# Altium PCB Biocoin_v1.3.PcbDoc (part 1 of 2)
Units mil, origin at the board's own origin, x right, y up, seen from the top; angles counter-clockwise.
Board outline 980.35 x 1027.62 mil, 6 copper layers (Top Signal, GND1, Middle Signal, Power, GND2, Bottom Signal), stack 37.008 mil thick; 101 components, 107 nets, 425 pads, 204 vias.
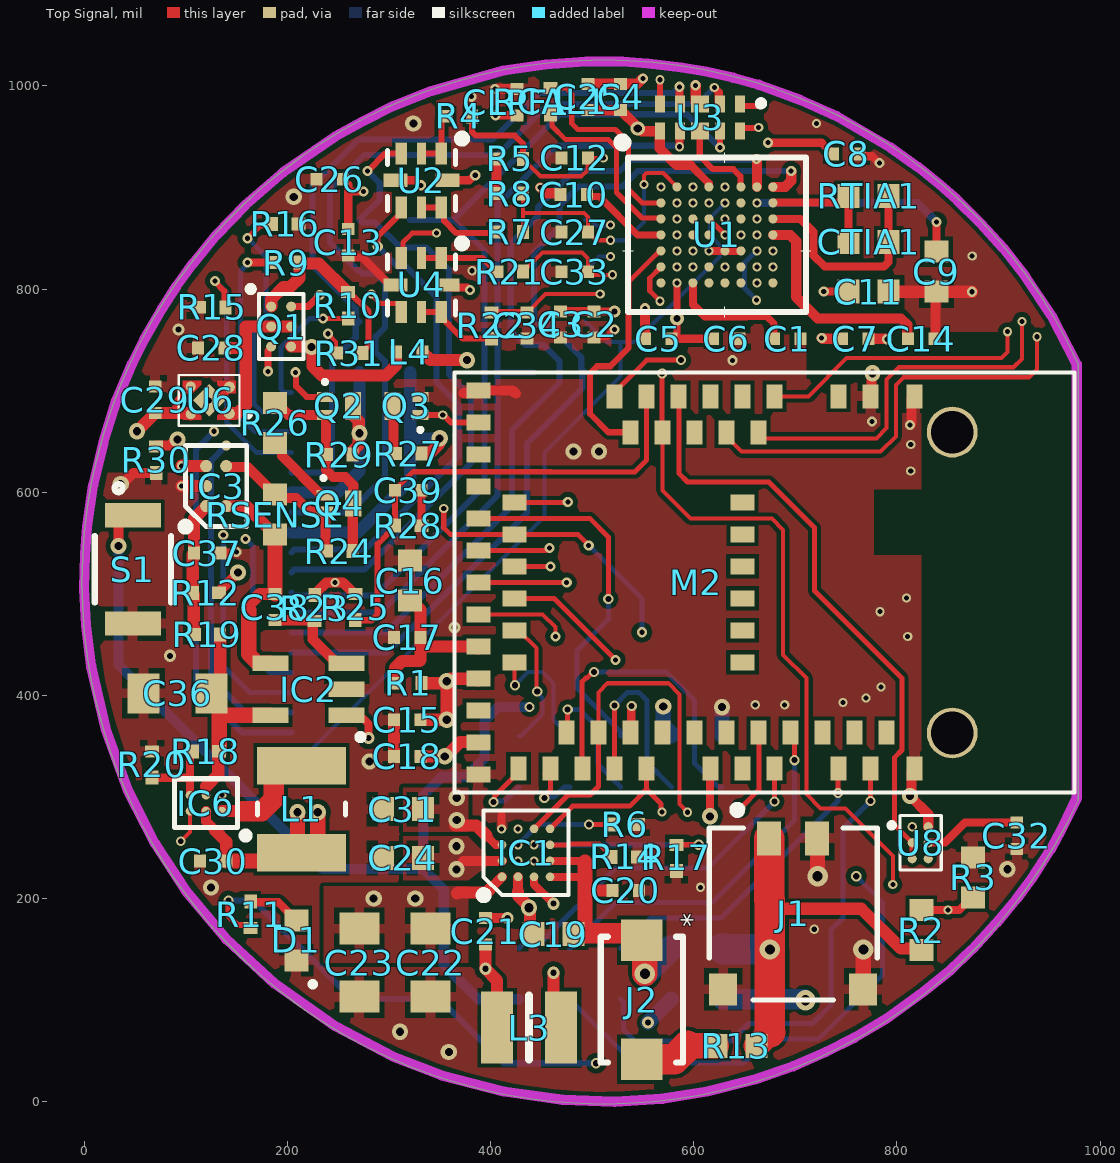
[diagram p0: Top Signal view]
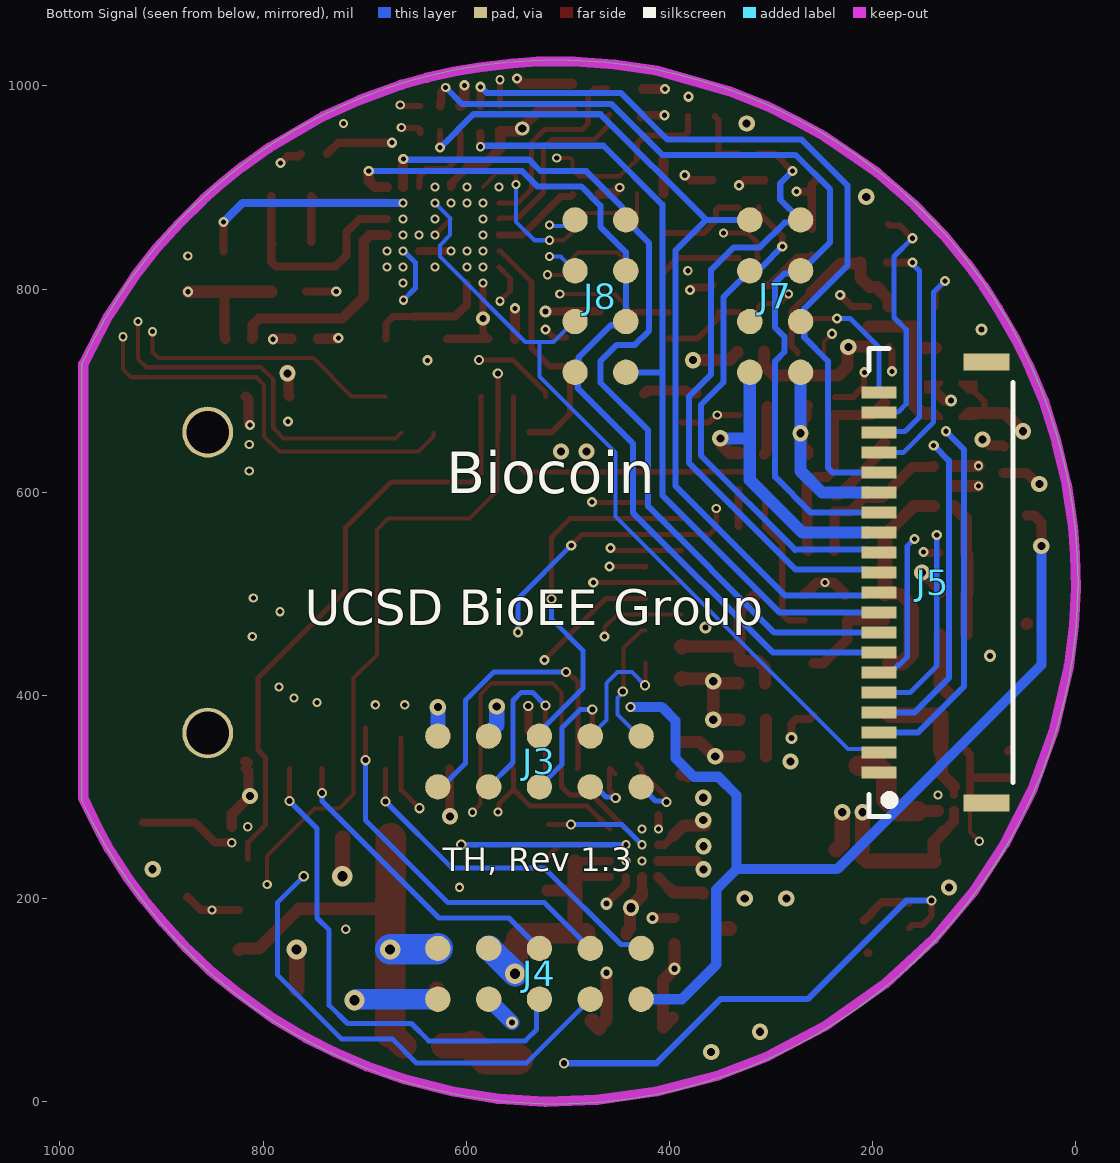
[diagram p1: Bottom Signal view, seen from below]
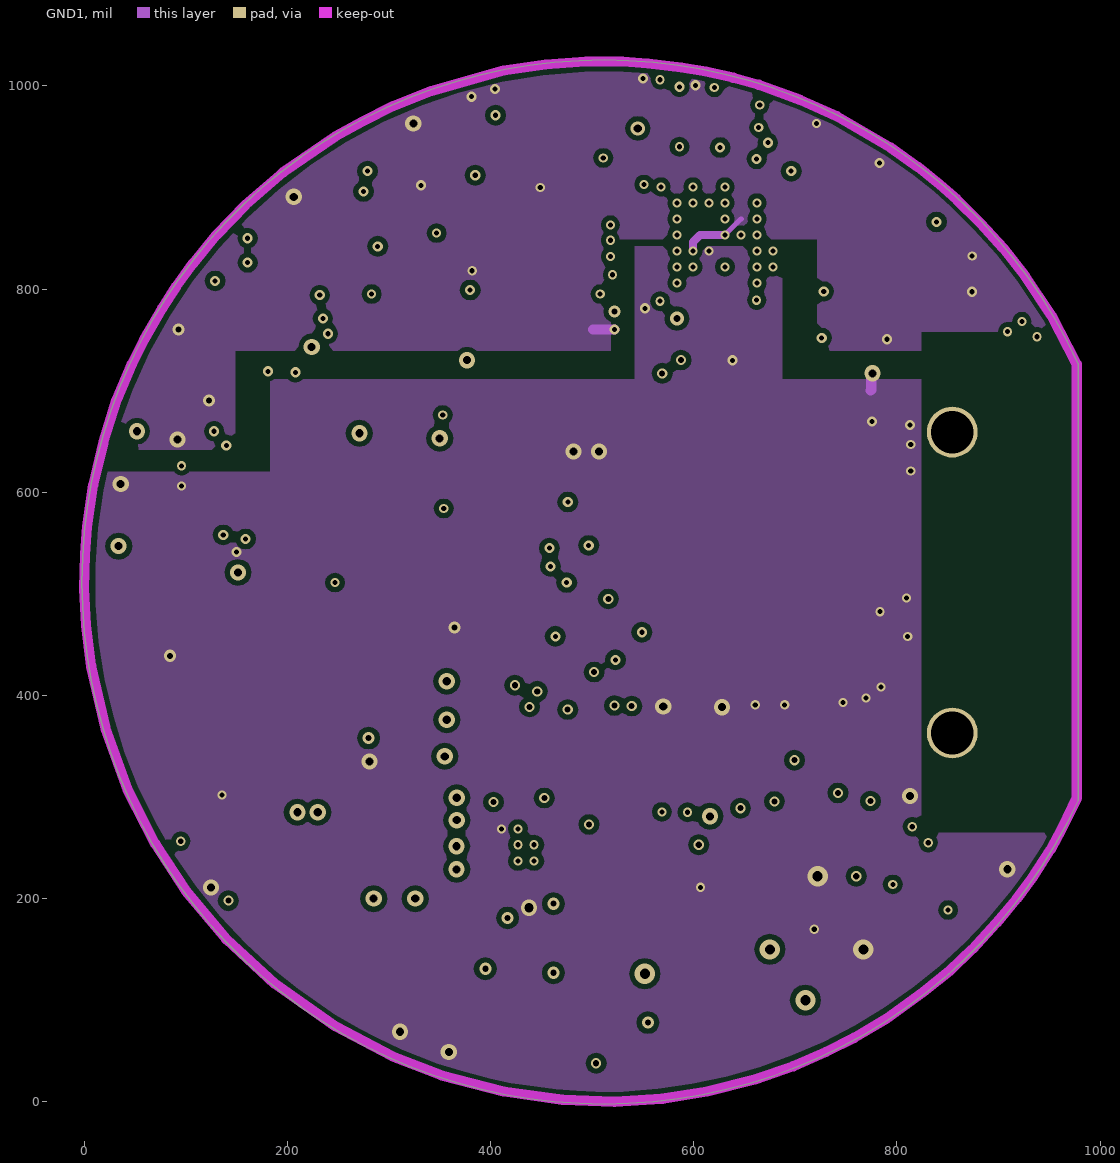
[diagram p2: GND1]
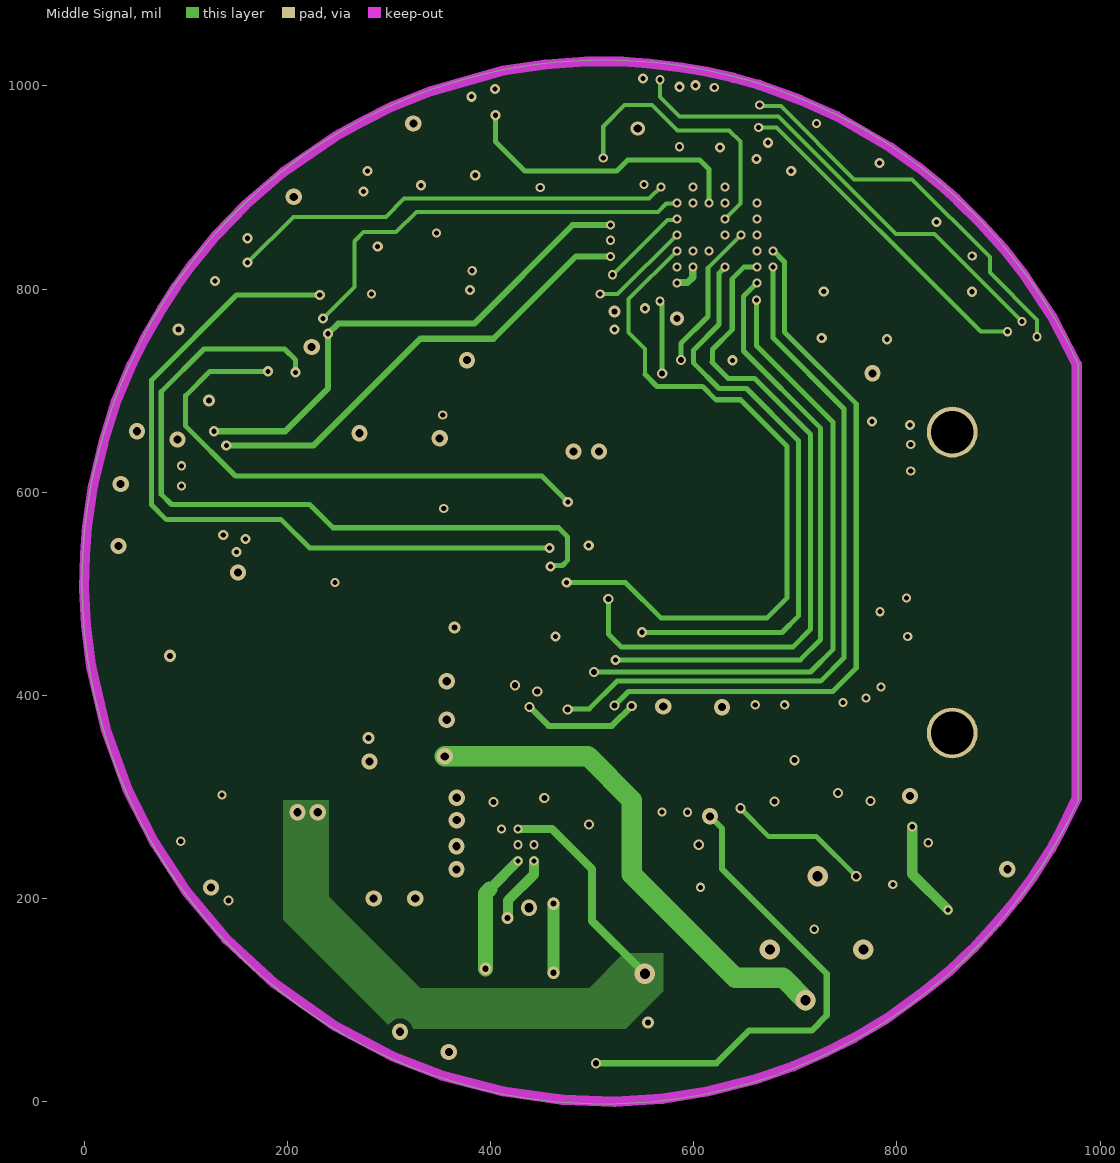
[diagram p3: Middle Signal]
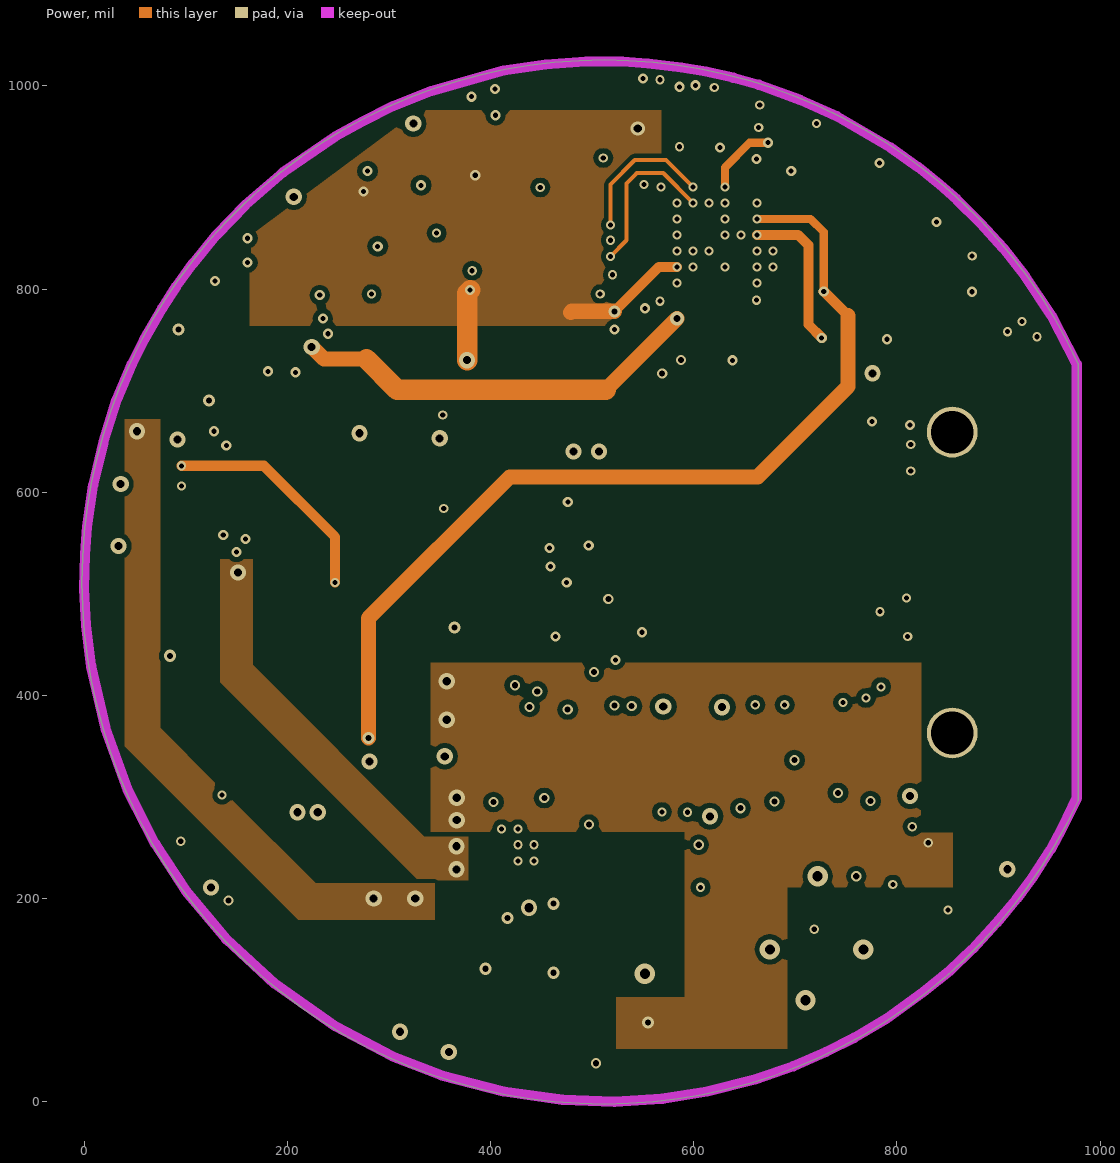
[diagram p4: Power]
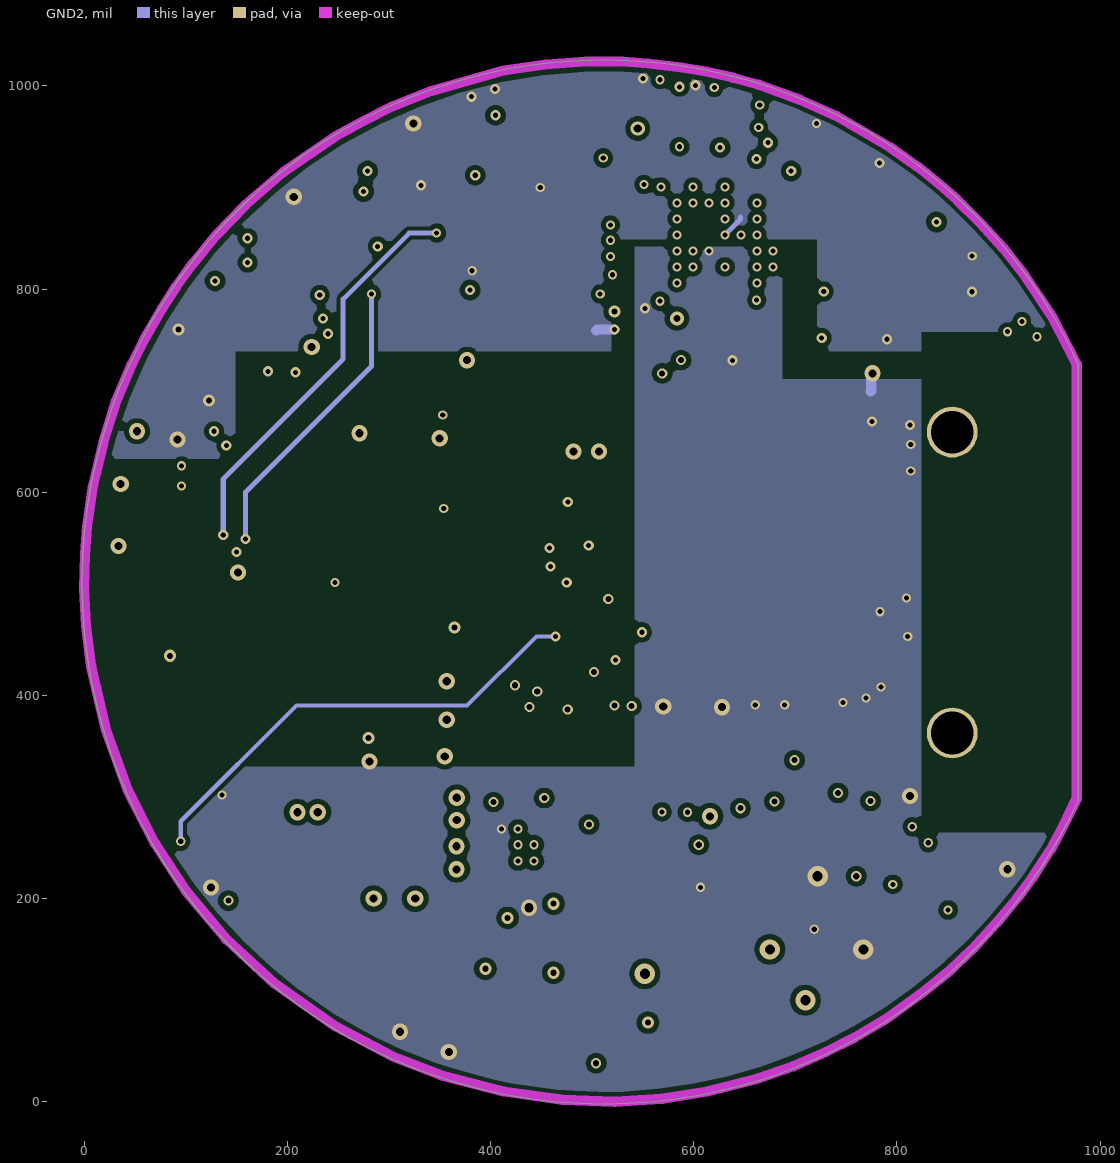
[diagram p5: GND2]
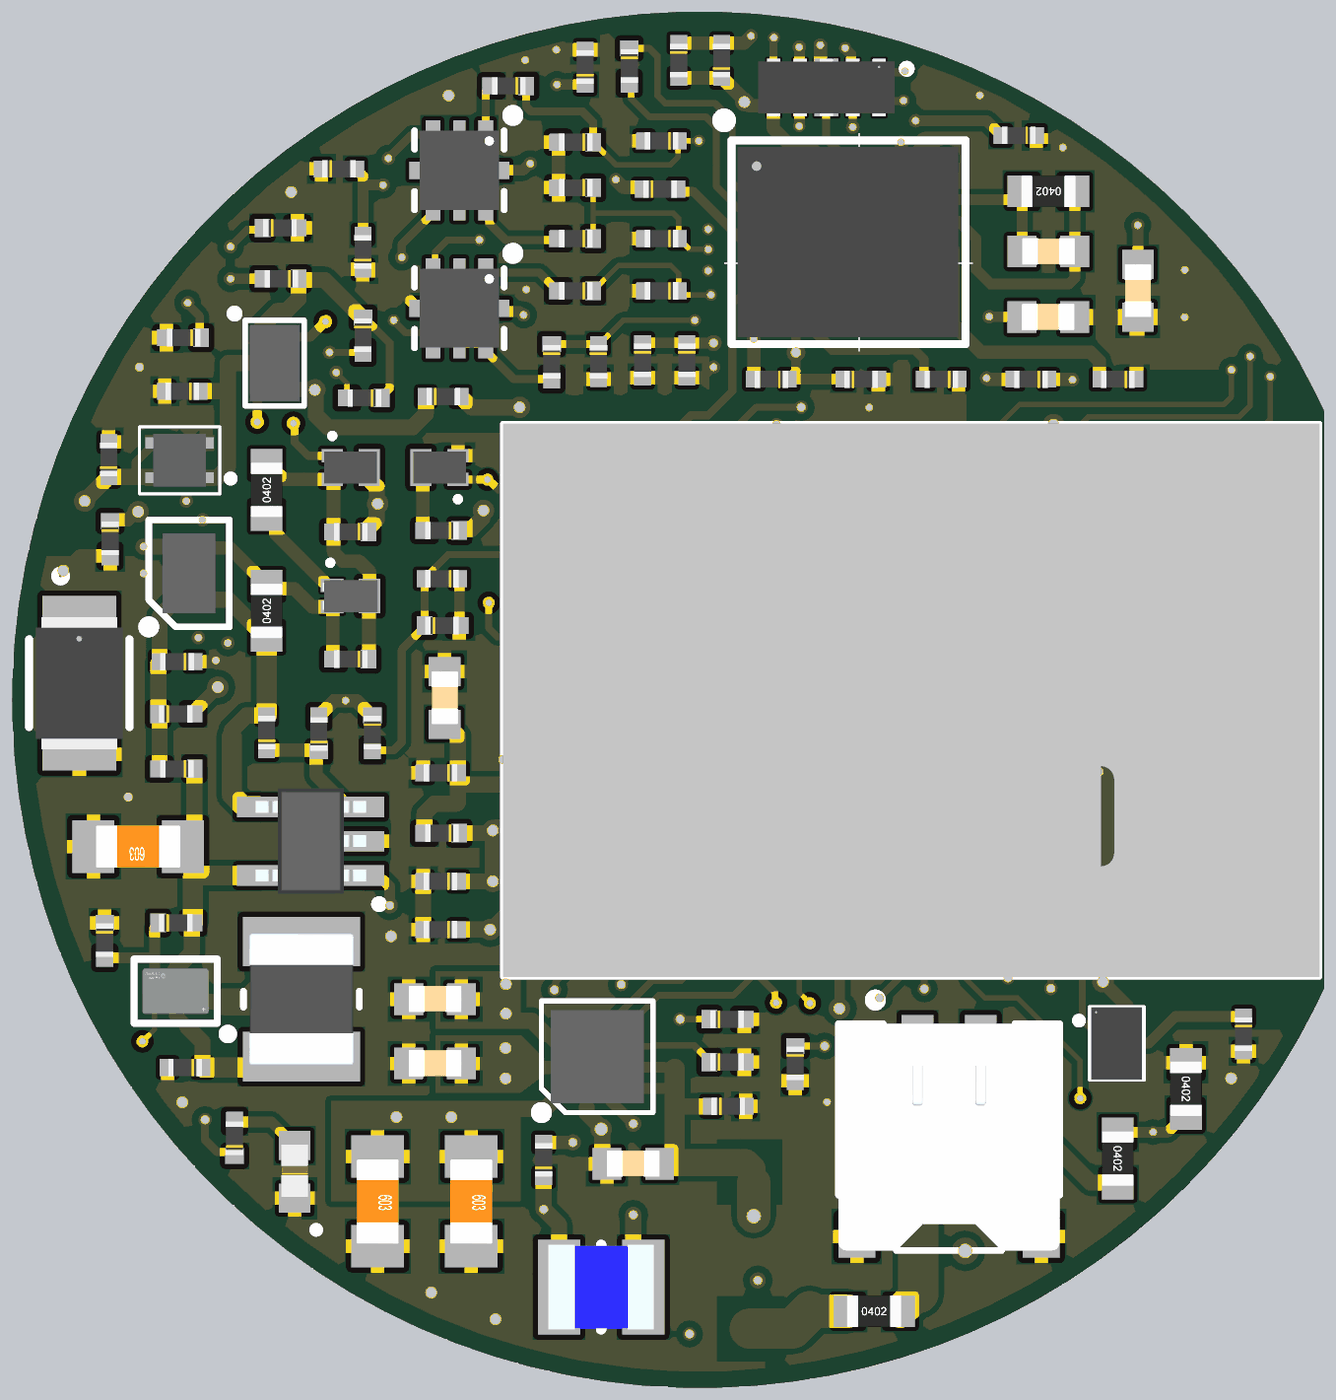
[diagram p7: 3D render of the assembled board from above, using the file's embedded part models]

## Layer stack, top to bottom
Top Solder: solder mask 0.4, Solder Resist, Dk 3.5
Top Signal: signal copper 1.378
Dielectric 2: prepreg 4.3307, PP-006, Dk 4.2
GND1: signal copper 1.378
Dielectric 4: core 7.874, FR-4, Dk 4.2
Middle Signal: signal copper 1.378
Dielectric 1: prepreg 4.3307, PP-006, Dk 4.2
Power: signal copper 1.378
Dielectric 5: core 7.874, FR-4, Dk 4.2
GND2: signal copper 1.378
Dielectric 3: prepreg 4.3307, PP-006, Dk 4.2
Bottom Signal: signal copper 1.378
Bottom Solder: solder mask 0.4, Solder Resist, Dk 3.5

## Board outline
978.29,296.33 978.29,726.71 978.2,727.09 ccw(c511.75,511.61) 511.75,1025.42 ccw(c511.75,511.61) -2.06,511.61 ccw(c511.75,511.61) 511.75,-2.2 ccw(c511.75,511.61)

## Design rules (kind name [scope] priority, off if disabled: settings)
Clearance Clearance_1 [All] p1: gap=4 ignorepadtopadclearanceinfootprint=TRUE except(5: Via-Fill Via-Poly Via-Region Fill-Hole Poly-Hole Region-Hole)
Clearance [All] p2: gap=5 ignorepadtopadclearanceinfootprint=TRUE
HoleSize [All] p1: absolutevalues=TRUE maxlimit=100 minlimit=4 maxpercent=80.000 minpercent=20.000
MinimumAnnularRing [All] p1: minimumring=2
MinimumSolderMaskSliver [All] p1: minsoldermaskwidth=2
PolygonConnect [All] p1: thpad.connectstyle=Relief thpad.reliefconductorwidth=10 thpad.reliefentries=4 thpad.polygonreliefangle="90 Angle" thpad.airgapwidth=8 smdpad.connectstyle=Relief smdpad.reliefconductorwidth=10 smdpad.reliefentries=4 smdpad.polygonreliefangle="90 Angle" smdpad.airgapwidth=5 via.connectstyle=Direct via.reliefconductorwidth=10 via.reliefentries=4 via.polygonreliefangle="90 Angle" via.airgapwidth=10
RoutingVias [All] p1: holewidth=4 width=8 viastyle="Through Hole" minholewidth=4 minwidth=8 maxholewidth=250 maxwidth=300
SilkToSilkClearance [All] p1: silktosilkclearance=5
SilkToSolderMaskClearance [IsPad] p1: minsilkscreentomaskgap=3 clearancetoexposedcopper=TRUE
SolderMaskExpansion [All] p1: expansion=4 istentingtop=FALSE
Width [All] p1: maxlimit=80 minlimit=4 preferedwidth=5
26 further rules are at their usual default settings.

## Classes and differential pairs
component class Current_Source: C37 C38 C39 IC2 IC3 Q2 Q3 Q4 R12 R19 R23 R24 R25 R26 R27 R28 R29 RSENSE
component class "Power Management": C19 C20 C21 C22 C23 C24 C28 C29 C30 C31 C36 IC1 IC6 J1 J2 L1 L3 L4 Q1 R6 R13 R14 R17 R18 R20 R30 U6
component class MCU_BLE_Module: C15 C16 C17 C18 C32 D1 J3 J4 M2 R1 R2 R3 R11 S1 U8
component class AFE: C1 C2 C3 C4 C5 C6 C7 C8 C9 C10 C11 C12 C13 C14 C25 C26 C27 C33 C34 CLPF1 CTIA1 J5 J7 J8 R4 R5 R7 R8 R9 R10 R15 R16 R21 R22 R31 RCAL1 RTIA1 U1 U2 U3 U4

## Components (designator, comment, footprint, x,y, rotation, side; value= is the part's Value field where it differs from the comment)
C1 "CAP" "0201 CAP" 692.09,751 r180 top value=470nF
C2 "CAP" "0201 CAP" 502,765.09 r270 top value=4.7uF
C3 "CAP" "0201 CAP" 469,765.09 r270 top value=100nF
C4 "CAP" "0201 CAP" 528,989 r90 top value=100nF
C5 "CAP" "0201 CAP" 565.09,751 r180 top value=4.7uF
C6 "CAP" "0201 CAP" 632.09,751 r0 top value=100nF
C7 "CAP" "0201 CAP" 759.09,751 r180 top value=470nF
C8 "CAP" "0201 CAP" 750,933 r180 top value=4.7uF
C9 "CAP" 0402-CAP 839,817.06 r90 top value=100nF
C10 "CAP" "0201 CAP" 482,893 r0 top value=470nF
C11 "CAP" 0402-CAP 772,797.32 r180 top value=100nF
C12 "CAP" "0201 CAP" 483,929 r180 top value=100nF
C13 "CAP" "0201 CAP" 260,846 r90 top value=100nF
C14 "CAP" "0201 CAP" 824.09,751 r180 top value=470nF
C15 "CAP" "0201 CAP" 318,376 r180 top value=4.7uF
C16 "CAP" 0402-CAP 321,513 r90 top value=22uF
C17 "CAP" "0201 CAP" 318,457 r180 top value=100nF
C18 "CAP" "0201 CAP" 318,340 r180 top value=4.7uF
C19 "CAP" 0402-CAP 462,165 r180 top value=22uF
C20 "CAP" "0201 CAP" 533,208 r0 top value=1uF
C21 "CAP" "0201 CAP" 395,168 r90 top value=100nF
C22 "CAP" 0603-CAP 341,137 r270 top value=47uF
C23 "CAP" 0603-CAP 271,137 r270 top value=47uF
C24 "CAP" 0402-CAP 313.86,240 r180 top value=22uF
C25 "CAP" "0201 CAP" 496,989 r270 top value=4.7uF
C26 "CAP" "0201 CAP" 242,908 r0 top value=4.7uF
C27 "CAP" "0201 CAP" 483,856 r180 top value=100nF
C28 "CAP" "0201 CAP" 125,742 r180 top value=4.7uF
C29 "CAP" "0201 CAP" 70,691 r90 top value=1uF
C30 "CAP" "0201 CAP" 127,237 r180 top value=4.7uF
C31 "CAP" 0402-CAP 313.86,288 r180 top value=22uF
C32 "CAP" "0201 CAP" 918,262 r270 top value=100nF
C33 "CAP" "0201 CAP" 483,817 r180 top value=100nF
C34 "CAP" "0201 CAP" 436,764.09 r270 top value=100nF
C36 "CAP" 0603-CAP 92,402 r180 top value=10uF
C37 "CAP" "0201 CAP" 121.09,540.07 r180 top value=100nF
C38 "CAP" "0201 CAP" 188,487 r90 top value=50nF
C39 "CAP" "0201 CAP" 319,602 r180 top value=1uF
CLPF1 "CAP" "0201 CAP" 426,984 r90 top value=100nF
CTIA1 "CAP" 0402-CAP 772.25,846.32 r180 top value=33nF
D1 "APHHS1005LCGCK" 0402-LED 209,159 r90 top
IC1 "MAX17270ENE+T" BGA16C40P4X4_177X177X50 435,245 r90 top
IC2 "OPA990IDCKR" SOT65P210X110-5N 221,406 r180 top
IC3 "MAX4372TEBT+T" BGA5C50P3X2_152X100X67 130,606 r90 top
IC6 "MAX17291ANT+T" MAXIM_INTEGRATED_N60N1-1_MFG 120,294 r180 top
J1 "BM02B-ACHSS-GAN-TF(LF)(SN)" JST_BM02B-ACHSS-GAN-TF(LF)(SN) 698,185 r0 top
J2 "PMEG3010ER,115" SDO_SOD-123FL_ONS-L 3459,50.5 r270 top
J3 "POGO_PIN_INTERFACE" POGO_PIN_INTERFACE_10PIN 428,310 r0 bottom
J4 "POGO_PIN_INTERFACE" POGO_PIN_INTERFACE_10PIN 428,101 r0 bottom
J5 "5034802000" MOLEX_5034802000 192,511 r90 bottom
J7 "POGO_PIN_INTERFACE_8pin" POGO_PIN_INTERFACE_8PIN 321,868 r90 bottom
J8 "POGO_PIN_INTERFACE_8pin" POGO_PIN_INTERFACE_8PIN 493,868 r90 bottom
L1 "DFE252012F-100M=P2" INDC2520X120N 214,288 r90 top
L3 "DFE201612E-2R2M=P2" 1286ASH1R0MP2 438,73 r180 top
L4 "IND" "0201 FERRITE" 320,738 r0 top
M2 "MDBT50Q_52840" MDBT50Q 974.77,511.25 r270 top
Q1 "CSD75208W1015" BGA6C50P2X3_145X95X62 194,763 r0 top
Q2 "DMP32D5SFB-7B" DESD6V8DLP7 241,685 r0 top
Q3 "DMN62D1LFB-7B" DESD6V8DLP7 327,685 r180 top
Q4 "TF412ST5G" TF412ST5G 251,589 r0 top
R1 "RES" "0201 RES" 319,412 r180 top value=0
R2 "RES" 0402-RES 824,169 r270 top value=10M
R3 "RES" 0402-RES 875,221 r270 top value=4.99M
R4 "RES" "0201 RES" 369,970 r180 top value=50k
R5 "RES" "0201 RES" 419,928 r180 top
R6 "RES" "0201 RES" 532,273 r0 top value=113k
R7 "RES" "0201 RES" 419,856 r180 top value=50k
R8 "RES" "0201 RES" 419,894 r180 top
R9 "RES" "0201 RES" 199,826 r180 top value=100k
R10 "RES" "0201 RES" 260,784 r270 top value=100k
R11 "RES" "0201 RES" 164,184 r90 top value=5K
R12 "RES" "0201 RES" 120,501 r0 top value=0
R13 "RES" 0402-RES 642,55 r0 top value=0
R14 "RES" "0201 RES" 532,241 r0 top value=80.6k
R15 "RES" "0201 RES" 126,782 r180 top value=0
R16 "RES" "0201 RES" 198,864 r0 top value=0
R17 "RES" "0201 RES" 583,240 r270 top value=113k
R18 "RES" "0201 RES" 120,345 r0 top value=5.6M
R19 "RES" "0201 RES" 121,460 r180 top value=0
R20 "RES" "0201 RES" 67,332 r270 top value=374k
R21 "RES" "0201 RES" 419,817 r180 top value=50k
R22 "RES" "0201 RES" 401,764.09 r270 top value=50k
R23 "RES" "0201 RES" 227,486 r90 top value=10k
R24 "RES" "0201 RES" 251,542 r180 top value=0
R25 "RES" "0201 RES" 267,487 r270 top value=1k
R26 "RES" 0402-RES 188,668.32 r90 top value=100
R27 "RES" "0201 RES" 319,638 r180 top value=0
R28 "RES" "0201 RES" 319,567 r0 top
R29 "RES" "0201 RES" 251,637 r180 top value=0
R30 "RES" "0201 RES" 71,632 r270 top value=0
R31 "RES" "0201 res" 261,737 r180 top value=100k
RCAL1 "RES" "0201 RES" 459,985 r270 top value=10K
RSENSE "RES" 0402-RES 188,578 r90 top value=100
RTIA1 "RES" 0402-RES 772.25,891.32 r180 top value=10M
S1 "NANOT100AS" NANOT100AS_CNK-M 48,524 r270 top
U1 "AD5940" CB-56-3_ADI 622.87,853.32 r0 top
U2 "TLV8542RUGR" QFN50P150X150X40-8N 332,907 r270 top
U3 "TMUX1104DQAR" USON_104DQAR_TEX 606.31,968.81 r270 top
U4 "TLV8542RUGR" QFN50P150X150X40-8N 332,804 r270 top
U6 "TPS7A2036PDQNR" DQN0004A-MFG 123.08,690.4 r180 top
U8 "MAX44264EWT+T" 21-0217D_W61B1-1_MXM 823,255 r0 top

## Footprints (in the part's own frame and the unit in brackets; to place one, negate y for a bottom-side part, rotate by r counter-clockwise, add the part's x,y. Pads: shape width x height; smd on the part's side, far side on the other; paste and mask are expansions set on the pad)
21-0217D_W61B1-1_MXM [mil]
  round 9 smd paste+0 mask+2: A1(-7.87,15.75) A2(7.87,15.75) B1(-7.87,0) B2(7.87,0) C1(-7.87,-15.75) C2(7.87,-15.75)
  silkscreen extent -28,-27 21,27, body extent -19,-27 19,27, height 27
"0201 CAP" [mm]
  rect 0.3x0.32 smd mask+0.076: 1(-0.33,0) 2(0.33,0)
  body extent -0.32,-0.17 0.32,0.17, height 0.33
"0201 FERRITE" [mm]
  rect 0.3x0.32 smd mask+0.076: 1(-0.33,0) 2(0.33,0)
  body extent -0.32,-0.17 0.32,0.17, height 0.33
"0201 RES" [mm]
  rect 0.3x0.35 smd: 1(-0.33,0)
  rect 0.35x0.32 smd: 2(0.33,0)
  body extent -0.32,-0.17 0.32,0.17, height 0.33
"0201 res" [mm]
  rect 0.3x0.35 smd: 1(-0.33,0)
  rect 0.35x0.32 smd: 2(0.33,0)
  body extent -0.32,-0.17 0.32,0.17, height 0.33
0402-CAP [mm] "Chip Capacitor, 2-Leads, Body 1.00x0.50mm, IPC Low Density"
  rect 0.55x0.6 smd mask+0.076: 1(-0.5,0) 2(0.5,0)
  body extent -0.51,-0.25 0.51,0.25, height 0.5
0402-LED [mm]
  rect 0.55x0.6 smd mask+0.076: 1(-0.5,0) 2(0.5,0)
  body extent -0.47,-0.25 0.52,0.25, height 0.51
0402-RES [mm]
  rect 0.55x0.6 smd mask+0.076: 1(-0.5,0) 2(0.5,0)
  body extent -0.52,-0.3 0.52,0.3, height 0.34
0603-CAP [mm] "Chip Capacitor, 2-Leads, Body 1.60x0.80mm, IPC Low Density"
  rect 0.8x1 smd: 1(-0.85,0) 2(0.85,0)
  body extent -0.8,-0.4 0.8,0.4, height 0.3
1286ASH1R0MP2 [mm]
  rect 0.8x1.8 smd: 1(-0.8,0) 2(0.8,0)
  silkscreen extent 0,-0.8 0,0.8, body extent -1,-0.8 1,0.8, height 1.2
BGA5C50P3X2_152X100X67 [mm]
  round 0.305 smd mask+0.064: A1(-0.5,0.25) A2(0,0.25) A3(0.5,0.25) B1(-0.5,-0.25) B3(0.5,-0.25)
  silkscreen extent -1.11,-0.76 1.01,0.86, body extent -0.76,-0.5 0.76,0.5, height 0.67
BGA6C50P2X3_145X95X62 [mm]
  round 0.25 smd mask+0.089: A1(-0.25,0.5) A2(0.25,0.5) B1(-0.25,0) B2(0.25,0) C1(-0.25,-0.5) C2(0.25,-0.5)
  silkscreen extent -0.86,-0.81 0.56,1.04, body extent -0.48,-0.72 0.48,0.72, height 0.63
BGA16C40P4X4_177X177X50 [mm]
  round 0.216 smd mask+0.064: A1(-0.6,0.6) A2(-0.2,0.6) A3(0.2,0.6) A4(0.6,0.6) B1(-0.6,0.2) B2(-0.2,0.2) B3(0.2,0.2) B4(0.6,0.2) C1(-0.6,-0.2) C2(-0.2,-0.2) C3(0.2,-0.2) C4(0.6,-0.2) D1(-0.6,-0.6) D2(-0.2,-0.6) D3(0.2,-0.6) D4(0.6,-0.6)
  silkscreen extent -1.16,-1.06 1.06,1.16, body extent -0.88,-0.88 0.88,0.88, height 0.5
CB-56-3_ADI [mil]
  round 9 smd paste+0 mask+2: A1(-55.12,47.24) A2(-39.37,47.24) A3(-23.62,47.24) A4(-7.87,47.24) A5(7.87,47.24) A6(23.62,47.24) A7(39.37,47.24) A8(55.12,47.24) B1(-55.12,31.5) B2(-39.37,31.5) B3(-23.62,31.5) B4(-7.87,31.5) B5(7.87,31.5) B6(23.62,31.5) B7(39.37,31.5) B8(55.12,31.5) C1(-55.12,15.75) C2(-39.37,15.75) C3(-23.62,15.75) C4(-7.87,15.75) C5(7.87,15.75) C6(23.62,15.75) C7(39.37,15.75) C8(55.12,15.75) D1(-55.12,0) D2(-39.37,0) D3(-23.62,0) D4(-7.87,0) D5(7.87,0) D6(23.62,0) D7(39.37,0) D8(55.12,0) E1(-55.12,-15.75) E2(-39.37,-15.75) E3(-23.62,-15.75) E4(-7.87,-15.75) E5(7.87,-15.75) E6(23.62,-15.75) E7(39.37,-15.75) E8(55.12,-15.75) F1(-55.12,-31.5) F2(-39.37,-31.5) F3(-23.62,-31.5) F4(-7.87,-31.5) F5(7.87,-31.5) F6(23.62,-31.5) F7(39.37,-31.5) F8(55.12,-31.5) G1(-55.12,-47.24) G2(-39.37,-47.24) G3(-23.62,-47.24) G4(-7.87,-47.24) G5(7.87,-47.24) G6(23.62,-47.24) G7(39.37,-47.24) G8(55.12,-47.24)
  silkscreen extent -97,-81 92,95, body extent -83,-71 82,71, height 22
DESD6V8DLP7 [mm]
  rect 0.4x0.25 smd mask+0.074: 1(-0.1,0.225) 2(-0.1,-0.225)
  rect 0.4x0.7 smd: 3(0.6,0)
  silkscreen extent -0.15,0.55 -0.05,0.65, body extent -0.25,-0.3 0.75,0.3, height 0.53
DQN0004A-MFG [mm]
  round 0.279 smd paste-0.127 mask-0.127: 1(-0.505,0.33) 2(-0.505,-0.33)
  round 0.251 smd paste-0.113 mask-0.114: 3(0.459,-0.346) 4(0.459,0.346)
  rect 0.58x0.58 smd rot 135 paste-0.277 mask-0.279: 5(0,0)
  Top Signal region: -0.66,-0.175 -0.66,-0.485 -0.2,-0.485 -0.2,-0.385 -0.41,-0.175
  Top Signal region: 0.66,0.175 0.66,0.485 0.2,0.485 0.2,0.385 0.41,0.175
  Top Signal region: 0.66,-0.175 0.66,-0.485 0.2,-0.485 0.2,-0.385 0.41,-0.175
  Top Signal region: -0.66,0.175 -0.66,0.485 -0.2,0.485 -0.2,0.385 -0.41,0.175
  silkscreen extent -0.97,-0.64 0.76,0.64, body extent -0.5,-0.5 0.5,0.5, height 0.37
INDC2520X120N [mm]
  rect 0.935x2.22 smd: 1(-1.09,0) 2(1.09,0)
  silkscreen extent -0.15,-1.1 0.15,1.1, body extent -1.25,-1 1.25,1, height 1.21
JST_BM02B-ACHSS-GAN-TF(LF)(SN) [mm]
  rect 0.6x0.85 smd: 1(-0.6,1.887) 2(0.6,1.887)
  rect 0.7x0.8 smd: S1(-1.75,-1.887) S2(1.75,-1.887)
  silkscreen extent -2.1,-2.15 2.1,2.7, body extent -2.1,-2.15 2.1,2.15, height 1.45
MAXIM_INTEGRATED_N60N1-1_MFG [mm]
  round 0.216 smd mask+0.064: A1(-0.4,0.2) A2(0,0.2) A3(0.4,0.2) B1(-0.4,-0.2) B2(0,-0.2) B3(0.4,-0.2)
  silkscreen extent -1.04,-0.61 0.79,0.86, body extent -0.63,-0.43 0.63,0.43, height 0.5
MDBT50Q [mm]
  rect 0.6x0.4 smd mask+0.051: 1(-4.65,-4) 2(-4.65,-5.1) 3(-4.65,-5.9) 4(-4.65,-7.5) 5(-3.75,-7.9) 6(-4.65,-8.3) 7(-3.75,-8.7) 8(-4.65,-9.1) 9(-3.75,-9.5) 10(-4.65,-9.9) 11(-3.75,-10.3) 12(-4.65,-10.7) 13(-3.75,-11.1) 14(-4.65,-11.5) 34(4.65,-13.9) 35(4.65,-13.1) 36(3.75,-12.7) 37(4.65,-12.3) 38(3.75,-11.9) 39(4.65,-11.5) 40(3.75,-11.1) 41(4.65,-10.7) 42(3.75,-10.3) 43(3.75,-9.5) 44(4.65,-9.1) 45(3.75,-8.7) 46(4.65,-8.3) 47(3.75,-7.9) 48(4.65,-7.5) 49(3.75,-7.1) 50(3.75,-6.3) 51(4.65,-5.9) 52(3.75,-5.5) 53(4.65,-5.1) 54(3.75,-4.7) 55(4.65,-4)
  rect 0.4x0.6 smd mask+0.051: 15(-4.8,-14.9) 16(-4,-14.9) 17(-3.2,-14.9) 18(-2.4,-14.9) 19(-2,-14) 20(-1.6,-14.9) 21(-1.2,-14) 22(-0.8,-14.9) 23(-0.4,-14) 24(0,-14.9) 25(0.4,-14) 26(0.8,-14.9) 27(1.2,-14) 28(1.6,-14.9) 29(2,-14) 30(2.4,-14.9) 31(3.2,-14.9) 32(4,-14.9) 33(4.8,-14.9) 56(-2,-8.3) 57(-1.2,-8.3) 58(-0.4,-8.3) 59(0.4,-8.3) 60(1.2,-8.3) 61(2,-8.3)
  silkscreen extent -5.25,-15.5 5.25,0, body extent -5.25,-15.5 5.25,0, height 2.06
MOLEX_5034802000 [mm]
  rect 0.3x0.878 smd: 1(-4.75,0.051) 2(-4.25,0.051) 3(-3.75,0.051) 4(-3.25,0.051) 5(-2.75,0.051) 6(-2.25,0.051) 7(-1.75,0.051) 8(-1.25,0.051) 9(-0.75,0.051) 10(-0.25,0.051) 11(0.25,0.051) 12(0.75,0.051) 13(1.25,0.051) 14(1.75,0.051) 15(2.25,0.051) 16(2.75,0.051) 17(3.25,0.051) 18(3.75,0.051) 19(4.25,0.051) 20(4.75,0.051)
  rect 0.427x1.152 smd: S1(-5.512,-2.642) S2(5.512,-2.642)
  silkscreen extent -5.85,-3.3 5.85,0.3, body extent -5.85,-3.3 5.85,0.3, height 1.89
NANOT100AS_CNK-M [mil]
  rect 24x55 smd paste+0 mask+4: 1(-53.21,0) 2(53.21,0)
  silkscreen extent -84,-38 33,38, body extent -49,-33 49,33, height 22
POGO_PIN_INTERFACE_8PIN [mil]
  round 25 smd: 1(-150,0) 2(-100,0) 3(-50,0) 4(0,0) 5(-150,-50) 6(-100,-50) 7(-50,-50) 8(0,-50)
POGO_PIN_INTERFACE_10PIN [mil]
  round 25 smd: 1(0,0) 2(50,0) 3(100,0) 4(150,0) 5(200,0) 6(0,-50) 7(50,-50) 8(100,-50) 9(150,-50) 10(200,-50)
QFN50P150X150X40-8N [mm]
  rect 0.55x0.287 smd mask+0.076: 1(-0.675,0.5) 3(-0.675,-0.5) 5(0.675,-0.5) 7(0.675,0.5)
  rect 0.55x0.229 smd mask+0.076: 2(-0.675,0) 6(0.675,0)
  rect 0.33x0.6 smd mask+0.076: 4(0,-0.65) 8(0,0.65)
  silkscreen extent -1.14,-0.85 0.75,1.12, body extent -0.75,-0.75 0.75,0.75, height 0.41
SDO_SOD-123FL_ONS-L [mil]
  rect 41x41 smd paste+0 mask+4: 1(-108.5,-2910) 2(8.5,-2910)
  silkscreen extent -112,-2950 12,-2870, body extent -125,-2946 25,-2874, height 39
SOT65P210X110-5N [mm]
  rect 0.895x0.387 smd mask+0.089: 1(-0.95,0.65) 2(-0.95,0) 3(-0.95,-0.65) 4(0.95,-0.65) 5(0.95,0.65)
  silkscreen extent -1.35,1.14 -1.24,1.24, body extent -1.05,-1 1.05,1, height 1.1
TF412ST5G [mil]
  rect 16.93x9.87 smd mask+2: 1(-14,8) 2(-14,-8)
  rect 16.14x25.65 smd: 3(14,0)
  silkscreen extent -17,23 -13,27, body extent -21,-12 20,12, height 21
USON_104DQAR_TEX [mil]
  rect 17x10 smd paste-5 mask+1.5: 1(-13.19,39.38) 2(-13.19,19.69) 4(-13.19,-19.69) 5(-13.19,-39.38) 6(13.19,-39.38) 7(13.19,-19.69) 9(13.19,19.69) 10(13.19,39.38)
  rect 17x18 smd paste+0 mask+1.5: 3(-13.19,0) 8(13.19,0)
  silkscreen extent -17,57 -11,63, body extent -21,-51 21,51, height 22

## Part data
C1 C2 C3 C4 C5 C6 C7 C8 C9 C10 C11 C12 C13 C14 C15 C16 C17 C18 C19 C20 C21 C22 C23 C24 C25 C26 C27 C28 C29 C30 C31 C32 C33 C34 C36 C37 C38 C39 CLPF1 CTIA1: library part "CAP SMD", "Multilayer Chip Capacitor", Designer=OMIGA
D1: "Green LED 0402", Mfr_Name=Kingbright, Copyright="Copyright (C) 2022 Ultra Librarian. All rights reserved.", Manufacturer_Part_Number=APHHS1005LCGCK, RefDes=RefDes, Type=DEV
IC1: "nanoPower Triple-Output, Single-Inductor, / Multiple-Output (SIMO) Buck-Boost Regulator", Manufacturer_Name="Maxim Integrated", Datasheet Link=https://pdfserv.maximintegrated.com/en/ds/MAX17270-MAX17271.pdf, Height=0.5mm, Manufacturer_Part_Number=MAX17270ENE+T
IC2: "Integrated Circuit", Manufacturer_Name="Texas Instruments", Mouser Part Number=595-OPA990IDCKR, Arrow Part Number=OPA990IDCKR, Arrow Price/Stock=https://www.arrow.com/en/products/opa990idckr/texas-instruments?region=nac, Datasheet Link=https://www.ti.com/lit/gpn/OPA990, Height=1.1mm, Manufacturer_Part_Number=OPA990IDCKR, Mouser Price/Stock=https://www.mouser.co.uk/ProductDetail/Texas-Instruments/OPA990IDCKR?qs=XeJtXLiO41TSF5QBGuARgQ%3D%3D
IC3: "Integrated Circuit", Manufacturer_Name="Analog Devices", Mouser Part Number=700-MAX4372TEBT+T, Datasheet Link=https://pdfserv.maximintegrated.com/en/ds/MAX4372-MAX4372T.pdf, Height=0.67mm, Manufacturer_Part_Number=MAX4372TEBT+T, Mouser Price/Stock=https://www.mouser.co.uk/ProductDetail/Maxim-Integrated/MAX4372TEBT%2bT?qs=1eQvB6Dk1vi20izC9qMksw%3D%3D
IC6: "Integrated Circuit", Manufacturer_Name="Analog Devices", Mouser Part Number=700-MAX17291ANT+T, Arrow Part Number=MAX17291ANT+T, Arrow Price/Stock=https://www.arrow.com/en/products/max17291antt/maxim-integrated?region=nac, Datasheet Link=https://datasheets.maximintegrated.com/en/ds/MAX17291.pdf, Height=0.5mm, Manufacturer_Part_Number=MAX17291ANT+T, Mouser Price/Stock=https://www.mouser.co.uk/ProductDetail/Maxim-Integrated/MAX17291ANT%2bT?qs=zW32dvEIR3vWkhPvj9WnJw%3D%3D
J1: "Connector Header Surface Mount, Right Angle 2 position 0.047 (1.20mm)", Package=None, Availability="In Stock", Check_prices=https://www.snapeda.com/parts/BM02B-ACHSS-GAN-TF(LF)(SN)/JST+Sales+America+Inc./view-part/?ref=eda, MF="JST Sales", MP=BM02B-ACHSS-GAN-TF(LF)(SN), Price=None, Purchase-URL=https://pricing.snapeda.com/search/part/BM02B-ACHSS-GAN-TF(LF)(SN)/?ref=eda, SnapEDA_Link=https://www.snapeda.com/parts/BM02B-ACHSS-GAN-TF(LF)(SN)/JST+Sales+America+Inc./view-part/?ref=snap
J2: library part SCHOTTKY_LowVf
J5: "20 Position FFC, FPC Connector Contacts, Top and Bottom 0.020 (0.50mm) Surface Mount, Right Angle", Package=None, Availability="In Stock", Check_prices=https://www.snapeda.com/parts/503480-2000/Molex/view-part/?ref=eda, MF=Molex, MP=503480-2000, Price=None, Purchase-URL=https://pricing.snapeda.com/search/part/503480-2000/?ref=eda, SnapEDA_Link=https://www.snapeda.com/parts/503480-2000/Molex/view-part/?ref=snap
L1: "Inductor with Inductance: 10uH Tol. +/-20%, Package: 1008 (2520)", Package="2520 Murata", Digi-Key_Part_Number=490-13050-1-ND, DigiKey-Purchase-URL=https://snapeda.com/shop?store=DigiKey&id=1498782, MF="Murata Electronics", Mouser-Purchase-URL=https://snapeda.com/shop?store=Mouser&id=1498782, MP=DFE252012F-100M=P2, SnapEDA_Link=https://www.snapeda.com/parts/DFE252012F-100M=P2/Murata%20Electronics%20North%20America/view-part/1498782/?ref=snap
L3: "Inductor", Manufacturer_Name="Murata Electronics", Manufacturer_Part_Number=DFE201612E-2R2M=P2, Mouser2 Part Number=81-DFE201612E-2R2MP2, Datasheet Link=https://componentsearchengine.com//DFE201612E-2R2M=P2.pdf, Height=1.2mm, Mouser2 Price/Stock=https://www.mouser.com/Search/Refine.aspx?Keyword=81-DFE201612E-2R2MP2
L4: library part "IND SMD", "Surface Mount Inductor", Designer=OMIGA
Q1: "-20-V, P channel NexFETâ„¢ power MOSFET, dual Common Source WLP 1 mm x 1.5 mm, 108 mOhm, gate ESD prot", Package="DSBGA-6 Texas Instruments", Availability="In Stock", Check_prices=https://www.snapeda.com/parts/CSD75208W1015/Texas+Instruments/view-part/?ref=eda, MF="Texas Instruments", MP=CSD75208W1015, Price=None, Purchase-URL=https://pricing.snapeda.com/search/part/CSD75208W1015/?ref=eda, SnapEDA_Link=https://www.snapeda.com/parts/CSD75208W1015/Texas+Instruments/view-part/?ref=snap
Q2: "MOSFET (P-Channel)", Manufacturer_Name="Diodes Inc.", Mouser Part Number=621-DMP32D5SFB-7B, Arrow Part Number=DMP32D5SFB-7B, Arrow Price/Stock=https://www.arrow.com/en/products/dmp32d5sfb-7b/diodes-incorporated, Datasheet Link=https://www.diodes.com/assets/Datasheets/DMP32D5SFB.pdf, Height=0.53mm, Manufacturer_Part_Number=DMP32D5SFB-7B, Mouser Price/Stock=https://www.mouser.co.uk/ProductDetail/Diodes-Incorporated/DMP32D5SFB-7B?qs=MNIFWdyJgboORiafCqUWHQ%3D%3D
Q3: "MOSFET (N-Channel)", Manufacturer_Name="Diodes Inc.", Mouser Part Number=621-DMN62D1LFB-7B, Arrow Part Number=DMN62D1LFB-7B, Arrow Price/Stock=https://www.arrow.com/en/products/dmn62d1lfb-7b/diodes-incorporated?region=nac, Datasheet Link=https://www.diodes.com/assets/Datasheets/DMN62D1LFB.pdf, Height=0.53mm, Manufacturer_Part_Number=DMN62D1LFB-7B, Mouser Price/Stock=https://www.mouser.co.uk/ProductDetail/Diodes-Incorporated/DMN62D1LFB-7B?qs=y6ZabgHbY%252BxTi2UB8%252BIvCg%3D%3D
Q4: "N-ch JFET Transistor", Manufacturer_Name=onsemi, Mouser Part Number=863-TF412ST5G, Arrow Part Number=TF412ST5G, Arrow Price/Stock=https://www.arrow.com/en/products/tf412st5g/on-semiconductor, Datasheet Link=https://datasheet.datasheetarchive.com/originals/distributors/DKDS-17/338694.pdf, Height=0.44mm, Manufacturer_Part_Number=TF412ST5G, Mouser Price/Stock=https://www.mouser.co.uk/ProductDetail/onsemi/TF412ST5G?qs=k6dkFvHqcvBP99I1DFAJcQ%3D%3D
R1 R2 R3 R4 R5 R6 R7 R8 R9 R10 R11 R12 R13 R14 R15 R16 R17 R18 R19 R20 R21 R22 R23 R24 R25 R26 R27 R28 R29 R30 R31 RSENSE RTIA1: library part "RES SMD", "Surface Mount Resistor", Designer=OMIGA
  R5 R8 R19 R24 R28 R29 R31 RTIA1: Do Not Install=DNI
RCAL1: library part "RES 0201", "Surface Mount Resistor", Designer=OMIGA
S1: "Smallest Push Button Switch", Mfr_Name=C&K, Copyright="Copyright (C) 2022 Ultra Librarian. All rights reserved.", Digi-Key_Part_Number_1=108-NANOT100ASTR-ND, Digi-Key_Part_Number_2=108-NANOT100ASCT-ND, Digi-Key_Part_Number_3=108-NANOT100ASDKR-ND, Manufacturer_Part_Number=NANOT100AS, RefDes=RefDes, Type=DEV
U1: "High Precision, Impedance, and / Electrochemical Front End"
U2 U4: "Low power, tiny, low input bias current opamp", Mfr_Name="Texas Instruments", RefDes=RefDes, Type=Type
U3: library part TMUX1104DQAR_1, "No Description Available", Mfr_Name="Texas Instruments", Copyright="Copyright (C) 2022 Ultra Librarian. All rights reserved.", Digi-Key_Part_Number_1=296-TMUX1104DQARTR-ND, Digi-Key_Part_Number_2=296-TMUX1104DQARCT-ND, Digi-Key_Part_Number_3=296-TMUX1104DQARDKR-ND, Manufacturer_Part_Number=TMUX1104DQAR, RefDes=RefDes, Type=DEV
U6: "No Description Available", Mfr_Name="Texas Instruments", Copyright="Copyright (C) 2022 Ultra Librarian. All rights reserved.", Manufacturer_Part_Number=TPS7A2036PDQNR, RefDes=RefDes, Type=DEV
U8: "No Description Available", Mfr_Name="Maxim Integrated Products", Copyright="Copyright (C) 2022 Ultra Librarian. All rights reserved.", Manufacturer_Part_Number=MAX44264EWT+T, RefDes=RefDes, Type=DEV

## Free pads (board coordinates)
  round 50 hole 42 unplated: 1(854.5,363) 1(854.5,659.17)

## Via types
v1: diameter 9, hole 5, Top Signal to Bottom Signal, tented both sides, 75 vias
v2: diameter 10, hole 5, Top Signal to Bottom Signal, tented both sides, 45 vias
v3: diameter 16, hole 8, Top Signal to Bottom Signal, tented both sides, 34 vias
v4: diameter 10, hole 6, Top Signal to Bottom Signal, tented both sides, 22 vias
v5: diameter 12, hole 6, Top Signal to Bottom Signal, tented both sides, 11 vias
v6: diameter 9, hole 5, Top Signal to Bottom Signal, tented bottom, 6 vias
v7: diameter 20, hole 10, Top Signal to Bottom Signal, tented both sides, 5 vias
v8: diameter 10, hole 5, Top Signal to Bottom Signal, tented bottom, 3 vias
v9: diameter 16, hole 9, Top Signal to Bottom Signal, tented both sides, 1 vias
v10: diameter 14, hole 7, Top Signal to Bottom Signal, tented both sides, 1 vias
v11: diameter 14, hole 8, Top Signal to Bottom Signal, tented both sides, 1 vias

## Nets (pads, with @x,y where several pads share a name; then routed paths per layer and width w, separated by ;. In a path a pad name is that pad's centre, name@x,y a point inside that pad or via, vN(x,y) a via of type N, cw(c..) or ccw(c..) an arc to the next point about the centre after c; other vN are vias at no path point)
AFE_AVDD: C2.1 C3.1 C4.1 C13.2 C25.2 C26.2 L4.2 U1.A4 U1.F2 U2.8 U3.6 U4.8 | length 576.1
  Top Signal w8: C26.2@255,908 255,907.61 260,902.61 260,896 ; C13.2@260,859 260,896 ; v2(275,896) 260,896 ; U4.8@357.59,804 360.09,801.5 376.96,801.5 379.46,799 v2(380,799) ; U2.8@357.59,907 379.46,907 384.46,912 v2(385,912) ; C3.1@469,778.09 C2.1@502,778.09 502.05,778.05 v5(522,778) v5(522,778) ; 596.9,922 614.81,904.09 614.81,900.75 U1.A4@615,900.56
  Top Signal w10: C25.2@496,976 C4.1@528,976 528.91,975.09 529.3,975.09 544.23,960.16 544.23,958.77 v11(545,958) 546.08,958 548.85,955.23 566.93,955.23 566.93,949.19 566.62,948.88 566.62,938.38 583,922 596.9,922
  Top Signal w12: L4.2@333,738 333,737.8 333.09,737.7 333.3,737.7 341,730 v3@375.92,730
  Power w10: v5(522,778) 565.82,821.82 v1(583.5,821.82)
  Power w15: 479,777 480,778 v5(522,778)
  Power w20: v3(377,730) 377,796 v2(380,799)
AFE_GPIO0: M2.21 U1.F5 | length 851.7
  Top Signal w5: v6(354,584) 354,565 359.02,559.98 360.5,558.5 485.88,558.5 v2(496.69,547.69)
  Middle Signal w5: v2@548.98,462 687,462 703,478 703,651 652,702 625,702 600,727 600,740 625,765 625,815.53 v1@630.75,821.28
  Middle Signal w6: v1@630.75,821.28 v1(630.75,821.82)
  Bottom Signal w5: v2(496.69,547.69) 548.98,495.39 v2(548.98,462.2)
AFE_GPIO1: M2.14 U1.D6 | length 230.3
  Top Signal w5: M2.14@522.01,694.32 522.01,698.26 553.76,730 v4(587.5,730)
  Middle Signal w4: 614,820.82 v1(646.5,853.32)
  Middle Signal w5: v4(587.5,730) 587.5,746.5 614,773 614,820.82
AFE_GPIO2: M2.13 U1.E1 | length 245.1
  Top Signal w5: 536,807.03 562.79,833.82 562.93,833.82 566.67,837.57 U1.E1@567.76,837.57
  Top Signal w6: 536,807.03 536,742 518,724 505,724 498,717 498,677 516,659 537.65,659 M2.13@537.76,658.89
AFE_GPIO3_AUX: M2.24 U1.E2 | length 793
  Top Signal w5: M2.24@388.16,511.25 388.41,511 v2(475,511)
  Middle Signal w4: 552,716 552,741 536,757 536,790.06 v1(583.5,837.57)
  Middle Signal w5: v2(475,511) 533,511 568,476 672,476 692,496 692,645 646,691 621.86,691 608.86,704 564,704 552,716
AFE_GPIO4_AUX: M2.25 U1.G7 | length 722.8
  Top Signal w5: M2.25@423.59,495.5 462.5,495.5 v2(523,435)
  Middle Signal w5: v2(523,435) 705,435 725,455 725,663 649,739 649,792.83 v1(662.24,806.07)
AFE_R\E\S\E\T\: M2.11 U1.F1 | length 772.5
  Top Signal w4: M2.11@569.26,658.89 569.26,601.74 597,574 677,574 688,563 688,440 711,417 711,302.83 725.04,288.79 749.21,288.79 796,242 v6(796,214)
  Top Signal w5: v1(567,788) 556.76,798.24 556.76,810.63 567.76,821.63 U1.F1@567.76,821.82 ; v4(569,717) 569,659.15 M2.11@569.26,658.89
  Middle Signal w5: v1(567,788) 567,787.19 569,785.19 v4(569,717)
AFE_VDD: C5.1 C6.1 L4.1 Q1.C2 U1.F3 U1.G2 | length 675.7
  Top Signal w7: C5.1@578.09,751 578.09,751.39 583.5,756.8 v1(583.5,806.07)
  Top Signal w8: C5.1@578.09,751 C6.1@619.09,751
  Top Signal w12: Q1.C2@203.84,743.32 223.68,743.32 v3(224,743) 224.77,742.23 224.77,724.23 234,715 297,715 306.91,724.91 306.91,737.91 L4.1@307,738 307,738.2 L4.1@306.91,738.3
  Middle Signal w7: v1@583.7,806.26 593.95,806.26 599.06,811.38 v1@599.06,821.63
  Power w15: v3@224.19,742.81 v3(224,743) 224.27,743 236.27,731 278,731 ; 513.57,701 v10(583.55,770.97)
  Power w20: 278,731 308,701 513.57,701
  Bottom Signal w7: v1(583.5,806.07) v1@583.7,806.26 ; v1@599.06,821.63 v1(599.25,821.82)
AFE_VDD_CTRL: M2.19 Q1.C1 | length 606
  Top Signal w5: M2.19@423.59,589.99 v2@475.99,589.99
  Top Signal w7: v8(181,719) 181,739.39 184.16,742.55 Q1.C1@184.16,743.32
  Middle Signal w5: v8(181,719) 124,719 100,695 100,665 149,616 450.46,616 v2(476.13,590.33)
AGND: C2.2 C3.2 C4.2 C7.1 C8.1 C9.1 C10.1 C11.1 C12.2 C13.1 C14.1 C25.1 C26.1 C27.2 C28.2 C29.2 C33.2 C34.2 CLPF1.2 R5.2 R8.2 R15.2 R16.2 R30.1 U1.C4 U1.D5 U1.E3 U2.4 U3.3 U4.4 U6.2 U6.5 | length 638.5
  Top Signal w5: U1.C4@615,869.06 v1(630.75,853.32) U1.D5@630.75,853.1
  Top Signal w6: C2.2@502,752.09 514.09,752.09 v2(522,760)
  Top Signal w8: C13.1@260,833 261.91,831.09 274,831.09 301.1,804 U4.4@306.41,804 ; U2.4@306.41,907 326.2,907 331.13,902.07 v2(331.67,902.07) ; C8.1@763,933 763,932.61 764.91,930.7 775.76,930.7 782.46,924 v2(783,924)
  Top Signal w10: R30.1@71,645 71.91,645.91 84.28,645.91 90.38,652 v3(92,652) ; v5(123.08,690.4) 129.7,690.4 142.7,703.39 U6.2@142.96,703.39 ; v2@331.59,902 v2(331.67,902.07) ; v2(404.42,997) CLPF1.2@426,997 ; R8.2@406,894 R5.2@406,928 ; v1(449,900) 454.7,894.3 468.09,894.3 469,893.39 C10.1@469,893 ; C25.1@496,1002 C4.2@528,1002 544.65,1002 v2(550,1007.35) ; v2(601.71,1000.51) 602,1000.22 602,983.69 605.5,980.19 U3.3@606,980.19 ; C7.1@772.09,751 789.79,751 v2(790.21,750.58) ; C14.1@837.09,751 838,751.91 838,795.39 C9.1@839.98,797.38
  Top Signal w12: C11.1@791.68,797.32 C9.1@838.97,797.35 ; C9.1@839.98,797.38 873.94,797.38 v2(874,797.32)
  GND1 w5: v1(630.75,853.32) 646.43,869 647,869
  GND1 w8: v1(599.25,837.57) 599.44,837.76 599.44,846.44 606.32,853.32 v1(630.75,853.32)
  GND1 w10: 501,760 v2(522,760)
  GND2 w5: v1(630.75,853.32) 646,868.57 646,871
  GND2 w10: 504,759 505,760 v2(522,760)
  other v1: 382,818 874.14,832.55 721,963
  other v2: 381.24,989.31
  other v3: 206.33,890.7 324.06,962.83
  other v5: 93,760
AIN1: J5.4 J8.3 U1.B3 | length 975.9
  Middle Signal w6: v2(140,646) 226,646 331,751 403,751 484,832 v1(518,832)
  Power w4: v1(518,832) 534,848 534,904 544,914 570.06,914 v1(599.25,884.81)
  Bottom Signal w4: J8.3@494.16,819.16 J8.3@493,818 493.08,818 507.08,832 v1(518,832)
  Bottom Signal w6: v2(140,646) 125,631 125,417 158.95,383.05 J5.4@204,383.05
AIN2: J5.3 J8.4 R31.2 U1.A3 | length 1069.4
  Top Signal w4: v2(240,756) 248,748 R31.2@248,737
  Middle Signal w6: v2(128,660) 198,660 240,702 v2(240,756) 250,766 384,766 481,863 v1(518,863)
  Power w4: v1(518,863) 518,903 542,927 572.75,927 v1(599.25,900.5)
  Bottom Signal w4: J8.4@493,868 498.68,868 504.64,862.04 517.04,862.04 v1(518,863)
  Bottom Signal w6: v2(128,660) 110,642 110,409 155.64,363.36 J5.3@204,363.36
AIN3: J5.2 J8.2 U1.B5 | length 787.4
  Bottom Signal w4: J5.2@204,343.68 207.5,347.17 224.17,347.17 453,576 453,639 528.02,714.02 528.02,748 ; J8.2@493,768 496.08,764.92 497.12,764.92 514.04,748 528.02,748 ; v1(630.75,884.81) 616,870.06 616,853 626,843 626,832 542,748 528.02,748
AIN4: CLPF1.1 U1.B4 | length 313.6
  Top Signal w8: v2(405,971) CLPF1.1@426,971 426.39,971 CLPF1.1@428.3,969.09
  Middle Signal w5: v2(405,971) 405,945 434,916 524,916 535,927 606,927 615,918 v1(615,884.81)
AVDD_REG: C14.2 U1.D8 | length 215.3
  Top Signal w8: U1.D8@677.99,853.32 U1.D8@678.18,853.12
  Top Signal w10: U1.D8@678.18,853.12 678.31,853 695.14,853 701,847.14 701,792 722,771 804,771 810.19,764.81 810.19,751.91 C14.2@811.09,751
Boost_EN: IC6.A3 M2.26 | length 587.3
  Top Signal w4: v6@95.09,256.3 104.25,265.46 IC6.A3@104.25,286.13 ; M2.26@388.16,479.76 451.24,479.76 463.85,467.15 v2(463.85,458.15)
  GND2 w4: v6(95.16,256.49) 95.16,276.13 209.02,390 377,390 445.15,458.15 v2(463.85,458.15)
BuckBoost_CH1_EN: IC1.D4 M2.41 | length 159.2
  Top Signal w5: IC1.D4@458.62,268.62 481,291 537,291 553.51,307.51 ; M2.41@553.51,328.18 553.51,307.51 ; v6@568,286 568,293.02 553.51,307.51
  other v6: 568.7,285.4
BuckBoost_CH2_EN: IC1.C4 M2.38 | length 380.7
  Top Signal w4: M2.38@506.27,363.61 506.27,402.95 515.32,412 575,412 586,401 586,293 v6(594,285)
  Top Signal w5: IC1.C4@442.87,268.62 476.26,302 498,302 506.27,310.27 M2.38@506.27,363.61
CE0: J5.8 J8.8 U1.A7 | length 886.5
  Top Signal w10: v2(662,928) 662.24,927.76 U1.A7@662.24,900.56
  Bottom Signal w6: J5.8@204,461.79 296.79,461.79 421,586 421,661 468,708 468,728.86 451.86,745 434,745 420,759 420,845 446.64,871.64 446.64,880.64 482,916 527,916 538.23,927.23 661.23,927.23 v2(662,928)
CURRENT_SENSE_OUT: C39.2 M2.12 R25.2 R28.1 | length 476.4
  Top Signal w5: C39.2@306,602 306,602.39 323.72,620.11 459.88,620.11 460,620 542,620 553.51,631.51 M2.12@553.51,694.32
  Top Signal w6: R25.2@267,474 283,474 289,480 289,549.02 306,566.02 R28.1@306,567 C39.2@306,602
DE0: U1.B6
DVDD_REG_1V8: C1.2 U1.G3 | length 123.9
  Top Signal w7: 652,773 672,773 679.09,765.91 C1.2@679.09,751
  Top Signal w8: U1.G3@599.25,806.07 599.25,784.75 611,773 652,773